# Altium PCB STM32F1_CNC_HW.PcbDoc
Units mil, origin at the board's own origin, x right, y up, seen from the top; angles counter-clockwise.
Board outline 5757.98 x 2962.75 mil, 2 copper layers (Top Layer, Bottom Layer); 64 components, 65 nets, 232 pads, 60 vias.
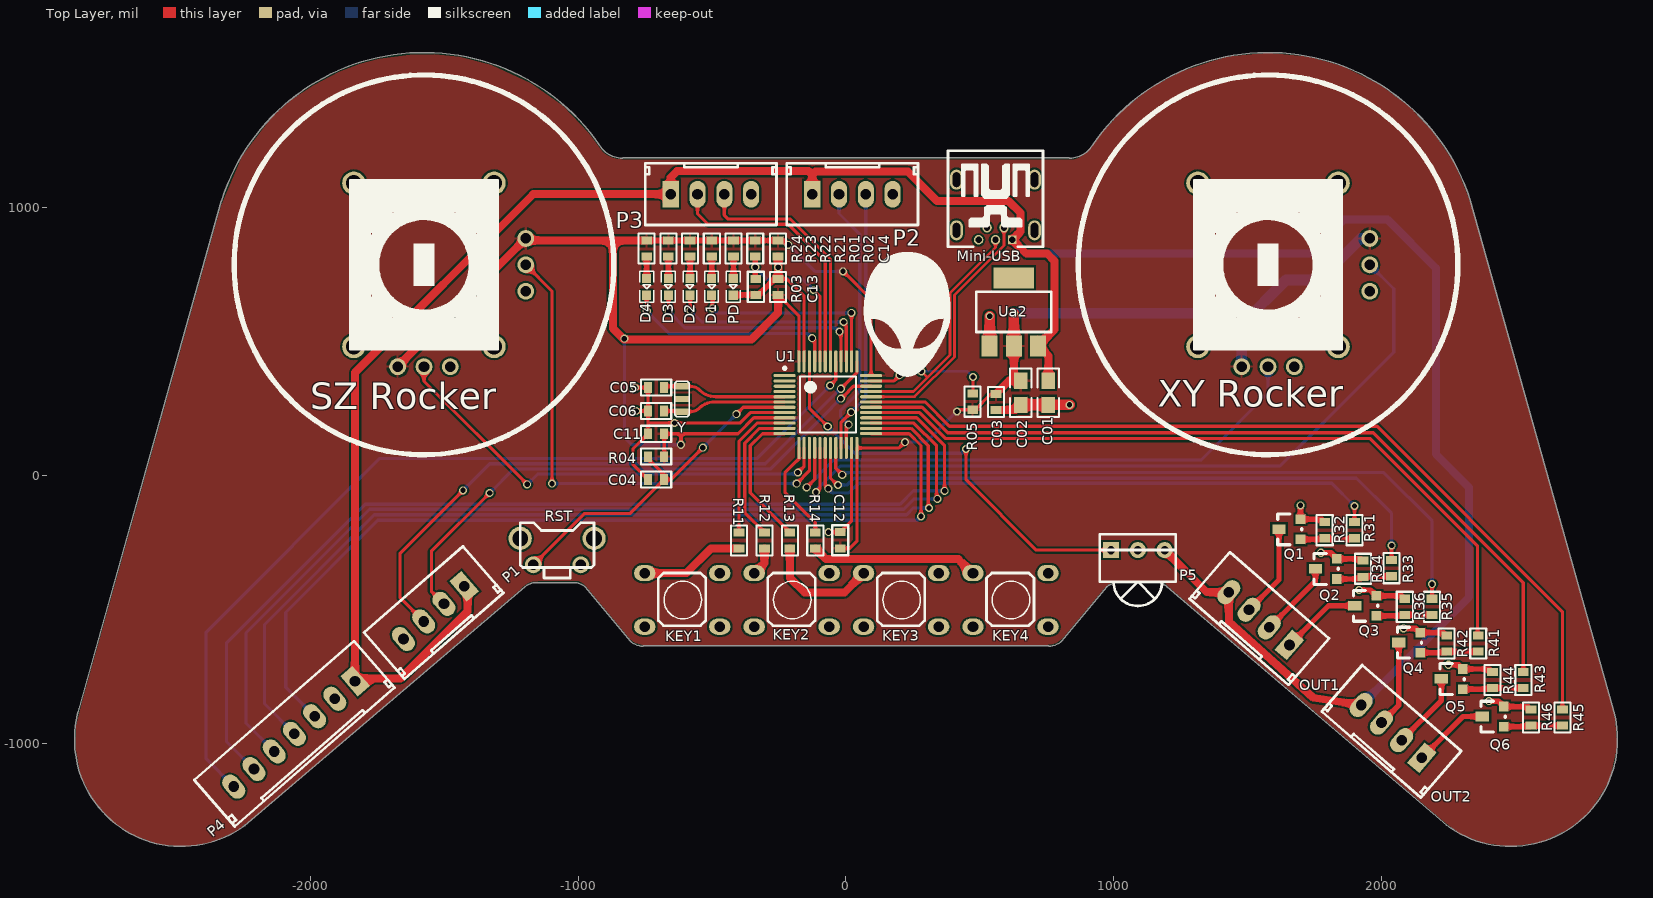
[diagram p0: Top Layer view]
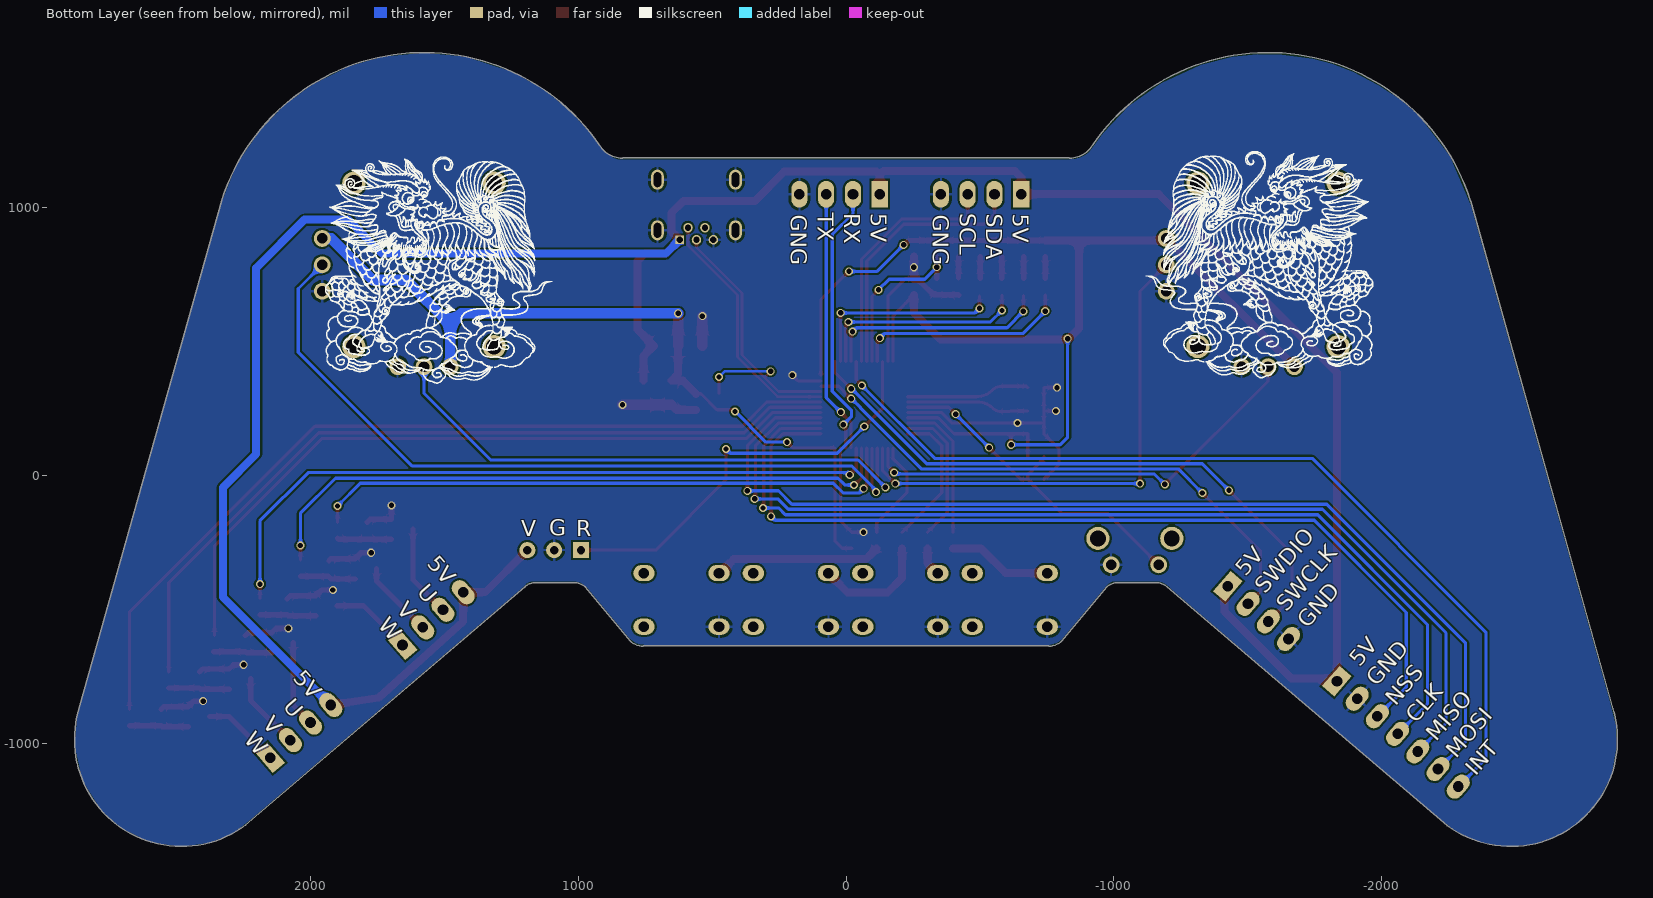
[diagram p1: Bottom Layer view, seen from below]

## Layer stack, top to bottom
Top Solder: solder mask 0.4, Solder Resist, Dk 3.5
Top Layer: signal copper 1.4
Dielectric 1: dielectric 12.6, FR-4, Dk 4.8
Bottom Layer: signal copper 1.4
Bottom Solder: solder mask 0.4, Solder Resist, Dk 3.5

## Board outline
-2862.24,-869.77 -2862.23,-869.73 cw(c-2480.32,-984.25) -2862.22,-869.68 -2862.23,-869.73 -2330.5,1025.82 -2330.47,1025.91 -2329.98,1027.68 cw(c-2325.15,1026.32) -2329.63,1028.58 cw(c-1574.8,787.4) -920.29,1234.1 cw(c-922.64,1229.67) -918.34,1232.25 ccw(c-836.57,1281.31) -834.16,1185.98 cw(c-833,1181.1) -833,1186.12 833,1186.12 cw(c833,1181.1) 834.16,1185.98 ccw(c836.57,1281.31) 918.34,1232.25 cw(c922.64,1229.67) 920.29,1234.1 cw(c1574.8,787.4) 2329.62,1028.6 cw(c2325.15,1026.32) 2329.98,1027.68 2858.61,-858.28 cw(c2480.32,-984.25) 2879.03,-984.25 cw(c2480.32,-984.25) 2241.09,-1303.22 cw(c2244.09,-1299.21) 2240.84,-1303.03 1198.61,-415.2 cw(c1201.86,-411.38) 1197.06,-412.85 ccw(c1159.5,-455.84) 1160.08,-398.76 ccw(c1159.5,-455.84) 1160.05,-398.75 1160.08,-398.76 1012.48,-398.72 cw(c1011.9,-393.74) 1011.95,-398.75 ccw(c1012.5,-455.84) 973.35,-414.29 805.17,-616.36 cw(c801.31,-613.15) 804.77,-616.78 cw(c758.5,-568.16) 759.15,-635.27 cw(c759.1,-630.26) 757.29,-634.94 -757.29,-634.94 cw(c-759.1,-630.26) -759.15,-635.27 cw(c-758.5,-568.16) -804.77,-616.78 cw(c-801.31,-613.15) -805.17,-616.36 -973.35,-414.29 ccw(c-1012.5,-455.84) -1011.95,-398.75 cw(c-1011.9,-393.74) -1012.53,-398.72 -1158.47,-398.72 cw(c-1159.1,-393.74) -1159.05,-398.75 ccw(c-1158.5,-455.84) -1197.85,-414.48 cw(c-1201.31,-410.85) -1198.12,-414.72 cw(c-1201.86,-411.38) -1198.61,-415.2 -2243.51,-1305.02 -2243.52,-1305.02 -2243.53,-1305.03 ccw(c-2246.77,-1301.2) -2243.51,-1305.02 -2243.53,-1305.03 cw(c-2246.77,-1301.2) -2243.8,-1305.24 cw(c-2480.32,-984.25)

## Design rules (kind name [scope] priority, off if disabled: settings)
Clearance [All] p1: gap=7
PolygonConnect PolygonConnect_1 [isvia] p1: connectstyle=Direct reliefconductorwidth=10 reliefentries=4 polygonreliefangle="90 Angle" airgapwidth=10
PolygonConnect [All] p2: connectstyle=Relief reliefconductorwidth=10 reliefentries=4 polygonreliefangle="90 Angle" airgapwidth=10
RoutingVias [All] p1: holewidth=28 width=50 viastyle="Through Hole" minholewidth=28 minwidth=50 maxholewidth=28 maxwidth=50
SolderMaskExpansion [All] p1: expansion=4
Width [All] p1: maxlimit=100 minlimit=10 preferedwidth=30
30 further rules are at their usual default settings.

## Components (designator, comment, footprint, x,y, rotation, side; value= is the part's Value field where it differs from the comment)
C01 "100nF" 0805 755,265 r90 top
C02 "10uF 0805" 0805 652,355 r270 top
C03 "100nF" 0603 560,245.42 r90 top
C04 "100nF" 0603 -677.69,-13 r180 top
C05 "20pF" 0603 -739.01,329 r0 top
C06 "20pF" 0603 -739.01,241.69 r0 top
C11 "100nF" 0603 -677.69,157.31 r180 top
C12 "100nF" 0603 -21,-271 r90 top
C13 "100nF" 0603 -253,674.36 r90 top
C14 "100nF" 0603 -254,879 r270 top
D1 "LED0" LED-0603 -501.5,737 r270 top
D2 "LED0" LED-0603 -582.25,737 r270 top
D3 "LED0" LED-0603 -663,737 r270 top
D4 "LED0" LED-0603 -743.75,737 r270 top
KEY1 "微动开关" KeyB-6*6 -751,-363 r0 top
KEY2 "微动开关" KeyB-6*6 -342.67,-363 r0 top
KEY3 "微动开关" KeyB-6*6 65.67,-363 r0 top
KEY4 "微动开关" KeyB-6*6 474,-363 r0 top
Mini-USB "Mini-USB" USB-mini-S 558,993 r0 top
OUT1 "Header 4" HDR-2.54-4P 1655,-631 r139 top
OUT2 "Header 4" HDR-2.54-4P 2149,-1052 r139 top
P1 "SWDIO" HDR-2.54-4P -1425,-412 r221 top
P2 "UART" HDR-2.54-4P -126,1051 r0 top
P3 "I2C" HDR-2.54-4P -654,1051 r0 top
P4 "SPI" HDR-2.54-7P -1832,-766 r221 top
P5 "IR" IR-HS1838 1089,-277 r0 top
PD "LED" LED-0603 -420.75,737 r270 top
Q1 "MOSFET-N" SOT-23 1696,-237 r90 top
Q2 "MOSFET-N" SOT-23 1832,-385 r90 top
Q3 "MOSFET-N" SOT-23 1979,-522.74 r90 top
Q4 "MOSFET-N" SOT-23 2143,-660 r90 top
Q5 "MOSFET-N" SOT-23 2302,-795.74 r90 top
Q6 "MOSFET-N" SOT-23 2455,-936 r90 top
R01 "510R" 0603 -419.29,817.69 r90 top
R02 "10K" 0603 -339,879 r270 top
R03 "0" 0603 -337,736 r270 top
R04 "10K" 0603 -677.69,72.16 r180 top
R05 "1.5K" 0603 473,246 r90 top
R11 "4.7K" 0603 -399.53,-210.26 r270 top
R12 "4.7K" 0603 -304.65,-210.26 r270 top
R13 "4.7K" 0603 -209.77,-210.26 r270 top
R14 "4.7K" 0603 -114.88,-210.26 r270 top
R21 "330R" 0603 -501.13,879 r270 top
R22 "330R" 0603 -582.2,879 r270 top
R23 "330R" 0603 -663.27,879 r270 top
R24 "330R" 0603 -744.34,879 r270 top
R31 "2K" 0603 1897,-172.26 r270 top
R32 "22K" 0603 1786,-172.26 r270 top
R33 "2K" 0603 2035,-314 r270 top
R34 "22K" 0603 1929,-316 r270 top
R35 "2K" 0603 2186,-458 r270 top
R36 "22K" 0603 2085,-458 r270 top
R41 "2K" 0603 2359,-595.26 r270 top
R42 "22K" 0603 2241,-595.26 r270 top
R43 "2K" 0603 2527,-731 r270 top
R44 "22K" 0603 2412,-731 r270 top
R45 "2K" 0603 2673,-871.26 r270 top
R46 "22K" 0603 2556,-871.26 r270 top
RST "SW-PB" RST-6*6 -1078,-332 r0 top
"SZ Rocker" "XY Rocker" "XY Rocker" -1574.8,787.4 r0 top
U1 "STM32F103C8" QFP48 -229,374 r0 top
Ua2 "LM1117-3.3" SOT223 536,485 r0 top
"XY Rocker" "XY Rocker" "XY Rocker" 1574.8,787.4 r0 top
Y "8MHZ" XTAL-3215-3P -612,287 r90 top

## Footprints (in the part's own frame and the unit in brackets; to place one, negate y for a bottom-side part, rotate by r counter-clockwise, add the part's x,y. Pads: shape width x height; smd on the part's side, far side on the other; paste and mask are expansions set on the pad)
0603 [mil]
  rect 30x40 smd: 1(0.66,0.41) 2(60.66,0.41)
  silkscreen extent -25,-30 87,30
0805 [mil]
  rect 60x50 smd: 1(0,0) 2(90,0)
  silkscreen extent -45,-40 135,40
HDR-2.54-4P [mil] "HDR-2.54mm-4P"
  rect 60x100 hole 40: 1(0,0)
  oval 60x100 hole 40: 2(100,0) 3(200,0) 4(300,0)
  silkscreen extent -95,-115 395,115
HDR-2.54-7P [mil] "HDR-2.54mm-7P"
  rect 60x100 hole 40: 1(0,0)
  oval 60x100 hole 40: 2(100,0) 3(200,0) 4(300,0) 5(400,0) 6(500,0) 7(600,0)
  silkscreen extent -95,-115 695,115
IR-HS1838 [mil] "IR-HS1838"
  rect 60x60 hole 31.5: 1(-100,0)
  round 60 hole 31.5: 2(0,0) 3(100,0)
  silkscreen extent -142,-209 142,59
KeyB-6*6 [mil] "KeyB-6*6*5mm"
  oval 80x60 hole 39.37: 1(0,0) 2(0,-200) 3(280,0) 4(280,-200)
  silkscreen extent 51,-196 228,1
LED-0603 [mil]
  rect 34x34 smd: 1(0,0) 2(63,0)
  silkscreen extent -26,-26 89,26
QFP48 [mm]
  oval 2.1x0.3 smd: 1(0,0) 2(0,-0.5) 3(0,-1) 4(0,-1.5) 5(0,-2) 6(0,-2.5) 7(0,-3) 8(0,-3.5) 9(0,-4) 10(0,-4.5) 11(0,-5) 12(0,-5.5) 25(8.2,-5.5) 26(8.2,-5) 27(8.2,-4.5) 28(8.2,-4) 29(8.2,-3.5) 30(8.2,-3) 31(8.2,-2.5) 32(8.2,-2) 33(8.2,-1.5) 34(8.2,-1) 35(8.2,-0.5) 36(8.2,0)
  oval 0.3x2.1 smd: 13(1.35,-6.85) 14(1.85,-6.85) 15(2.35,-6.85) 16(2.85,-6.85) 17(3.35,-6.85) 18(3.85,-6.85) 19(4.35,-6.85) 20(4.85,-6.85) 21(5.35,-6.85) 22(5.85,-6.85) 23(6.35,-6.85) 24(6.85,-6.85) 37(6.85,1.35) 38(6.35,1.35) 39(5.85,1.35) 40(5.35,1.35) 41(4.85,1.35) 42(4.35,1.35) 43(3.85,1.35) 44(3.35,1.35) 45(2.85,1.35) 46(2.35,1.35) 47(1.85,1.35) 48(1.35,1.35)
  silkscreen extent -0.12,-5.4 6.75,0.82, body extent 0.6,-6.25 7.6,0.75, height 1.6
RST-6*6 [mm] "侧按按键-6*6mm"
  round 2.2 hole 1.5: 0(-3.5,2.5) 0(3.5,2.5)
  round 1.6 hole 1: 1(-2.25,0) 2(2.25,0)
  Top Layer lines w0.254: 3.5,2.5 3.5,2.5
  silkscreen extent -3.5,-1.25 3.5,4
SOT223 [mil]
  rect 59x79 smd: 1(0,0) 2(90.55,0) 3(181.1,0)
  rect 150x79 smd: 4(89.88,253.54)
  silkscreen extent -49,52 231,202
SOT-23 [mil]
  rect 36x36 smd: 1(0,0) 2(75,0)
  rect 36x50 smd: 3(38,80)
  silkscreen extent -20,-5 95,85
USB-mini-S [mm]
  oval 1.2x1.9 hole 0.7 slot 1.4 at 90 deg: 0(-3.7,-1.95) 0(-3.7,2.85) 0(3.7,-1.95) 0(3.7,2.85)
  rect 0.8x0.8 hole 0.6: 1(1.6,-2.85)
  round 0.9 hole 0.6: 2(0.8,-1.7) 3(0,-2.85) 4(-0.8,-1.7) 5(-1.6,-2.85)
  silkscreen extent -4.5,-3.5 4.5,5.6
XTAL-3215-3P [mm]
  rect 0.6x1.5 smd paste-0.051 mask+0.051: 1(-1.2,0) 2(0,0) 3(1.2,0)
  silkscreen extent -1.7,-0.7 1.7,0.7
"XY Rocker" [mm]
  round 2.2 hole 1.5: 0(-6.65,-7.75) 1(6.65,-7.75) 2(6.65,7.75) 3(-6.65,7.75)
  round 1.6 hole 1: X1(-2.5,-9.65) X2(0,-9.65) X3(2.5,-9.65) Y1(9.65,2.5) Y2(9.65,0) Y3(9.65,-2.5)
  silkscreen extent -18,-18 18,18

## Part data
C01: library part "CAP SMD 0603  X5R 1礔 25V 10%", "0603  X5R"
C02: library part "CAP SMD 0603  X5R 1礔 25V 10%", "0603  X5R 1礔"
C03: library part Capacitor_ST, "Capacitor 0402 / 0603 / 0805"
C04 C05 C06 C11 C12 C13 C14: library part CAP, "Capacitor"
D1 D2 D3 D4: "Typical INFRARED GaAs LED"
Mini-USB: library part Mini-USB_G
OUT1 OUT2: "Header, 4-Pin"
P1 P2 P3: library part "Header 4", "Header, 4-Pin"
P4: library part "Header 7", "Header, 7-Pin"
P5: library part "Header 3", "Header, 3-Pin"
PD: library part LED2, "Typical RED, GREEN, YELLOW, AMBER GaAs LED"
Q1 Q2 Q3 Q4 Q5 Q6: "N-Channel MOSFET"
R01 R02 R03 R04 R05 R11 R12 R13 R14 R21 R22 R23 R24 R31 R32 R33 R34 R35 R36 R41 R42 R43 R44 R45 R46: library part RES1, "Resister"
RST: "Switch"
Ua2: library part "Volt Reg", "Voltage Regulator"
Y: library part ECS-10-13-1, "Crystal Oscillator"

## Via types
v1: diameter 30, hole 20, Top Layer to Bottom Layer, tented both sides, 60 vias

## Nets (pads, with @x,y where several pads share a name; then routed paths per layer and width w, separated by ;. In a path a pad name is that pad's centre, name@x,y a point inside that pad or via, vN(x,y) a via of type N, cw(c..) or ccw(c..) an arc to the next point about the centre after c; other vN are vias at no path point)
AD1: "SZ Rocker.X2" U1.14 | length 1729.3
  Top Layer w12: -1574.8,407.48 -1574.8,352.8 v1(-1190,-32) ; v1(-179.5,12.5) -156.17,35.83 U1.14
  Bottom Layer w12: v1(-1190,-32) -1151,7 -185,7 v1(-179.5,12.5)
AD2: "SZ Rocker.Y2" U1.15 | length 1922.9
  Top Layer w12: -1194.88,787.4 -1097,689.52 v1(-1097,-29) ; v1(-184,-29) -136.48,18.52 U1.15
  Bottom Layer w12: v1(-1097,-29) v1(-184,-29)
AD3: "XY Rocker.X2" U1.16 | length 2126.6
  Top Layer w12: v1(-147,-43) -116.8,-12.8 U1.16
  Bottom Layer w12: v1(-147,-43) -45,59 1326,59 1574.8,307.8 1574.8,407.48
AD4: "XY Rocker.Y2" U1.17 | length 2912.9
  Top Layer w12: v1@-113,-62 v1(-112,-61) -97.11,-46.11 U1.17
  Bottom Layer w12: v1(-112,-61) -112,-54.4 -20.6,37 1620,37 2044,461 2044,699 2043.13,699 1954.72,787.4
BOOT: R02.2 R03.1 U1.44 | length 610.5
  Top Layer w12: v1(-121,694) -97.11,670.11 U1.44
  Top Layer w20: R03.1@-338.59,737.34 v1(-338.59,779) R02.2
  Bottom Layer w12: v1(-338.59,779) -293.59,734 -161,734 v1(-121,694)
GND: "SZ Rocker.X3" "SZ Rocker.Y3" "XY Rocker.X3" "XY Rocker.Y3" C01.1 C02.2 C03.1 C04.2 C05.1 C06.1 C11.2 C12.2 C13.2 C14.2 KEY1.2 KEY2.2 KEY3.2 KEY4.2 Mini-USB.0 Mini-USB.5 P1.4 P2.4 P3.4 P4.2 P5.2 PD.2 Q1.2 Q2.2 Q3.2 Q4.2 Q5.2 Q6.2 R03.2 R32.1 R34.1 R36.1 R42.1 R44.1 R46.1 RST.2 U1.8 U1.23 U1.35 U1.47 Ua2.1 | length 3566.1
  Top Layer w12: v1(-787.59,329.41) C05.1 C06.1 ; v1(-782.9,242.1) C06.1 ; C04.2 -795,43.24 -795,100.25 C11.2 C06.1 ; -737.35,197 -396,197 -356.8,236.2 U1.8 ; C13.2 -221.01,735.01 -156.17,670.17 U1.47 ; v1(-65.34,-210.34) C12.2 21,-167.93 U1.23 ; U1.35 179.32,354.32 v1(200.5,375.5)
  Top Layer w20: PD.2 -419.41,675.34 R03.2 -326.66,675.34 -266.99,735.01 C13.2 ; v1(1696,-110) Q1.2 1775.49,-162 R32.1 ; v1(1772,-287) 1809,-287 Q2.2 1922.75,-310 R34.1 ; v1(1915,-426) 1957.26,-426 Q3.2 2074.49,-447.74 R36.1 ; v1(2081,-569) 2127,-569 Q4.2 2230.49,-585 R42.1 ; v1(2248,-705) 2286.26,-705 Q5.2 2401.49,-720.74 R44.1 ; v1@2394,-841 2435,-841 Q6.2 2545.49,-861 R46.1
  Top Layer w30: KEY1.2@-758.42,-563 KEY1.2 ; C13.2 v1(-253.41,778.41) C14.2@-253.41,818.16 ; C03.1 633.08,246.08 C02.2
  Top Layer w40: Ua2.1 v1(536,596) ; C02.2 C01.1 v1(834,265)
  other v1: 2399,-841 -640,197
I2C_SCL: P3.3 U1.42 | length 923.8
  Top Layer w12: P3.3 -454,973 -439,958 -207.13,958 -57.74,808.61 U1.42
I2C_SDA: P3.2 U1.43 | length 997
  Top Layer w12: P3.2 -554,978 -515,939 -215,939 -77.43,801.43 U1.43
IR: P5.1 U1.46 | length 1600
  Top Layer w12: U1.46 -136.48,252.48 v1(-68,184) ; v1(448,100) 448,-14.93 710.07,-277 P5.1
  Bottom Layer w12: v1(-68,184) 32,84 432,84 v1(448,100)
KEY1: R11.1 U1.10 | length 538.7
  Top Layer w12: R11.1 -399.12,129.88 -332.17,196.83 U1.10
KEY2: R12.1 U1.11 | length 535.3
  Top Layer w12: R12.1 -378,-137.16 -378,122 -322.85,177.15 U1.11
KEY3: R13.1 U1.12 | length 530.9
  Top Layer w12: U1.12 -311.54,157.46 -357,112 -357,-63.28 R13.1
KEY4: R14.1 U1.13 | length 383.9
  Top Layer w12: U1.13 -175.85,63.15 -228,11 -228,-61 -114.47,-174.53 R14.1
LED1: D1.2 U1.38 | length 751.4
  Top Layer w12: v1(-498,625) D1.2@-498,670.5 ; U1.38 v1@21,608
  Bottom Layer w12: v1(-498,625) -481,608 v1(20,608)
LED2: D2.2 U1.39 | length 801.8
  Top Layer w12: v1(-582,617) D2.2@-582,673.75 ; v1@-14,575 1.32,559.69 U1.39
  Bottom Layer w12: v1(-582,617) -539,574 v1(-9,574)
LED3: D3.2 U1.40 | length 840.2
  Top Layer w12: v1(-662,614) D3.2@-662,673 ; v1@-23,537 -18.37,532.37 U1.40
  Bottom Layer w12: v1(-662,614) -601,553 -39,553 v1(-24,538)
LED4: D4.2 U1.45 | length 809
  Top Layer w12: v1@-743.75,614.75 D4.2 ; v1(-126,514) -116.8,504.8 U1.45
  Bottom Layer w12: v1(-743.5,614.5) -660,531 -143,531 v1(-126,514)
NetD1_1: D1.1 R21.2 | length 80.6
  Top Layer w20: D1.1@-500.72,737.78 R21.2
NetD2_1: D2.1 R22.2 | length 80.9
  Top Layer w20: D2.1@-581.79,737.46 R22.2
NetD3_1: D3.1 R23.2 | length 81.2
  Top Layer w20: D3.1@-662.86,737.14 R23.2
NetD4_1: D4.1 R24.2 | length 81.2
  Top Layer w20: D4.1@-743.93,737.18 R24.2
NetKEY1_1: KEY1.1 R11.2 | length 390
  Top Layer w30: KEY1.1 -596,-363 -503.92,-270.92 R11.2
NetKEY2_1: KEY2.1 R12.2 | length 110.4
  Top Layer w30: KEY2.1@-343.67,-365 -304.24,-325.57 R12.2
NetKEY3_1: KEY3.1 R13.2 | length 436.1
  Top Layer w30: R13.2 -209.36,-380.64 -154,-436 -6.33,-436 KEY3.1@64.67,-365
NetKEY4_1: KEY4.1 R14.2 | length 626.4
  Top Layer w30: R14.2 -74.4,-311 419,-311 KEY4.1@473,-365
NetPD_1: PD.1 R01.1 | length 80.3
  Top Layer w20: PD.1@-419.7,738.06 R01.1
NetQ1_1: Q1.1 R31.2 R32.2 | length 203.1
  Top Layer w20: Q1.1 1893.33,-237 R31.2
NetQ2_1: Q2.1 R33.2 R34.2 | length 207.7
  Top Layer w20: Q2.1 1921.07,-385 R34.2 1931.41,-374.66 R33.2
NetQ3_1: Q3.1 R35.2 R36.2 | length 209.1
  Top Layer w20: Q3.1 2081.33,-522.74 R36.2 R35.2
NetQ4_1: Q4.1 R41.2 R42.2 | length 218.1
  Top Layer w20: Q4.1 2237.33,-660 R42.2 R41.2
NetQ5_1: Q5.1 R43.2 R44.2 | length 227.1
  Top Layer w20: Q5.1 2408.33,-795.74 R44.2 R43.2
NetQ6_1: Q6.1 R45.2 R46.2 | length 220.1
  Top Layer w20: Q6.1 2552.33,-936 R46.2 R45.2
NRST: C04.1 R04.2 RST.1 U1.7 | length 1291.1
  Top Layer w12: RST.1 -974.58,-140 -804.94,-140 C04.1 ; R04.2 -738.35,63.35 -678.35,3.35 C04.1 ; v1(-534,105) -652.41,-13.41 C04.1 ; v1(-409,230) -383.11,255.89 U1.7
  Bottom Layer w12: v1(-534,105) v1(-409,230)
OSC32I: U1.3
OSC32O: U1.4
OUT1_U: OUT1.3 Q1.3 | length 347.2
  Top Layer w20: OUT1.3 1616,-387.85 Q1.3
OUT1_V: OUT1.2 Q2.3 | length 289.8
  Top Layer w20: OUT1.2 1752,-392.92 Q2.3
OUT1_W: OUT1.1 Q3.3 | length 304.6
  Top Layer w20: OUT1.1 1801.26,-484.74 Q3.3
OUT2_U: OUT2.3 Q4.3 | length 325.7
  Top Layer w20: OUT2.3 2063,-855.85 Q4.3
OUT2_V: OUT2.2 Q5.3 | length 290.2
  Top Layer w20: OUT2.2 2222,-837.92 Q5.3
OUT2_W: OUT2.1 Q6.3 | length 289.8
  Top Layer w20: OUT2.1 2303,-898 Q6.3
PWM1_U: R31.1 U1.18 | length 2237.4
  Top Layer w12: U1.18 -77.43,-36.57 v1(-66,-48) ; R31.1@1897.5,-172.83 v1(1897.5,-112.5)
  Bottom Layer w12: v1(-66,-48) -50,-64 11,-64 47,-28 1813,-28 v1(1897.5,-112.5)
PWM1_V: R33.1 U1.19 | length 2451.8
  Top Layer w12: U1.19 -57.74,-9.26 v1@-34,-33 ; R33.1@2036,-314.07 v1(2036,-260)
  Bottom Layer w12: v1(-30,-34) 5,-34 30,-9 1905,-9 2036,-140 v1(2036,-260)
PWM1_W: R35.1 U1.20 | length 2679.2
  Top Layer w12: U1.20 -38.06,28.06 v1(-14,4) ; R35.1@2187,-458.07 v1(2187,-404)
  Bottom Layer w12: v1(-14,4) -6,12 2007,12 2187,-168 v1(2187,-404)
PWM2_U: R41.1 U1.29 | length 2803.4
  Top Layer w12: U1.29 274.8,236.2 372,139 1956,139 2357,-262 R41.1@2357,-595.92
PWM2_V: R43.1 U1.30 | length 3037.8
  Top Layer w12: U1.30 284.11,255.89 379,161 1968,161 2527.41,-398.41 R43.1
PWM2_W: R45.1 U1.31 | length 3269
  Top Layer w12: U1.31 295.43,275.57 386,185 1982,185 2673.41,-506.41 R45.1
SPI_CLK: P4.4 U1.26 | length 3588.2
  Top Layer w12: U1.26 242.85,177.15 307,113 307,-117 v1(310,-120)
  Bottom Layer w12: P4.4 -2170,-851.23 -2170,-555 -1760,-145 226,-145 251,-120 v1(310,-120)
SPI_INT: P4.7 U1.41 | length 3428.3
  Top Layer w12: v1(-59,337) -38.06,357.94 U1.41
  Bottom Layer w12: P4.7 -2388,-1056.46 -2388,-583 -1740,65 -331,65 v1(-59,337)
SPI_MISO: P4.5 U1.27 | length 3751.6
  Top Layer w12: U1.27 253.17,196.83 338,112 338,-83 v1(341,-86)
  Bottom Layer w12: P4.5 -2239,-923.31 -2239,-586 -1778,-125 215,-125 254,-86 v1(341,-86)
SPI_MOSI: P4.6 U1.28 | length 3913.3
  Top Layer w12: U1.28 263.48,216.52 368,112 v1(368,-56)
  Bottom Layer w12: P4.6 -2312,-991.38 -2312,-624 -1794,-106 202,-106 252,-56 v1(368,-56)
SPI_NSS: P4.3 U1.25 | length 3420.3
  Top Layer w12: U1.25 235.67,157.46 280,113.13 v1(280,-151)
  Bottom Layer w12: P4.3 -2091,-789.15 -2091,-510 -1747,-166 265,-166 v1(280,-151)
SWCLK: P1.3 U1.37 | length 2316.9
  Top Layer w12: P1.3 -1664,-455.15 -1664,-289 v1(-1429,-54) ; v1(-19,325) 40.68,384.67 U1.37
  Bottom Layer w12: v1(-1429,-54) -1330,45 -301.6,45 -21.6,325 v1(-19,325)
SWDIO: P1.2 U1.34 | length 2114.2
  Top Layer w12: P1.2 -1547,-431.08 -1547,-281 v1(-1330,-64) ; v1(-19,288) -16.38,288 9,313.38 9,316 27.63,334.63 U1.34
  Bottom Layer w12: v1(-1330,-64) -1240,26 -281,26 -55,252 -55,253.6 -20.6,288 v1(-19,288)
TEMP: U1.2
UART_RX: P2.2 U1.22 | length 1024.8
  Top Layer w12: U1.22 1.32,182.32 v1(10,191)
  Bottom Layer w12: P2.2 -26,979 51,902 51,315 -21,243 -21,222 v1(10,191)
UART_TX: P2.3 U1.21 | length 984.9
  Top Layer w12: U1.21 -18.37,199.63 v1(19.5,237.5)
  Bottom Layer w12: v1(19.5,237.5) 74,292 P2.3
USB-DM: Mini-USB.2 U1.32 | length 931.3
  Top Layer w10: U1.32 256.3,295.26 405,443.96 405,674.96 589.5,859.45 Mini-USB.2
USB-DP: Mini-USB.3 R05.2 U1.33 | length 1145.9
  Top Layer w10: U1.33 251.94,314.94 304,367 ; v1(281,390) 304,367 ; R05.2@474,308.07 v1(474,369) ; Mini-USB.3 558,852 388,682 388,451 304,367
  Bottom Layer w10: v1(281,390) 453,390 v1(474,369)
USB-ID: Mini-USB.4
VBAT: U1.1
VDD_3.3V: "SZ Rocker.X1" "SZ Rocker.Y1" "XY Rocker.X1" "XY Rocker.Y1" C02.1 C03.2 C11.1 C12.1 C13.1 C14.1 R01.2 R02.1 R04.1 R05.1 R21.1 R22.1 R23.1 R24.1 U1.9 U1.24 U1.36 U1.48 Ua2.2 | length 7921.1
  Top Layer w12: R04.1 C11.1 -616,156.9 ; v1(-616,116) -616,156.9 ; C13.1 -175.85,597.45 U1.48 ; U1.9 -343.48,216.52 -403.1,156.9 -616,156.9 ; C12.1 14.66,-270.34 40.68,-244.31 U1.24 198.32,104.32 v1(220,126) ; v1(-11,763) 93.83,658.17 U1.36 ; v1(414,240) 420.66,246.66 R05.1 481.66,246.66 541.08,306.08 C03.2
  Top Layer w20: R24.1 R23.1 R22.1 R21.1 R01.2 R02.1 C14.1 -233.34,878.34 -217,862 v1(-215,862)
  Top Layer w30: -1673.23,407.48 -1194.88,885.83 -1187.4,878.34 -870,878.34 ; R24.1 -870,878.34 ; C13.1 -253.41,608.59 -353,509 -829,509 -870,550 -870,878.34 ; C03.2 608.51,355 C02.1 626.55,380.45 Ua2.2
  Top Layer w40: Ua2.2 v1(626.55,606.55)
  Bottom Layer w12: v1(-827,512) -827,144 -799,116 v1(-616,116) ; v1(-215,862) -116,763 v1(-11,763) ; v1(220,126) 299,126 v1@415.5,242.5
  Bottom Layer w40: v1(626.55,606.55) 1435.45,606.55 1476.38,565.62 ; 1476.38,407.48 1476.38,565.62 ; 1954.72,885.83 1920.83,885.83 1766,731 1641.76,731 1476.38,565.62
VDD_5V: C01.2 Mini-USB.1 OUT1.4 OUT2.4 P1.1 P2.1 P3.1 P4.1 P5.3 Ua2.3 | length 10130.8
  Top Layer w30: P1.1 -1412,-425 -1412,-506 -1662,-756 -1832,-756 -1832,386 -1167,1051 P3.1 -654,1113 -630,1137 -140,1137 -126,1123 ; P2.1 -126,1123 ; C01.2 755,447.1 Ua2.3 778,545.9 778,802 751,829 672.79,829 Mini-USB.1 652,911.8 652,981 607,1026 340,1026 231,1135 -114,1135 -126,1123 ; P5.3 1346.18,-434.18 OUT1.4 1428.59,-543.59 1744,-828 OUT2.4
  Bottom Layer w30: Mini-USB.1 672.79,829 1731,829 1858,956 2021,956 2201,776 2201,81 2325,-43 2325,-452.77 OUT2.4
XTAL1: C05.2 U1.5 Y.3 | length 461.8
  Top Layer w12: C05.2 -673.52,334.24 Y.3 -580.39,334.24 cw(c-580.39,285.61) -546,320 ccw(c-486.27,379.73) -486.27,295.26 U1.5
XTAL2: C06.2 U1.6 Y.1 | length 456.6
  Top Layer w12: C06.2 Y.1@-614.34,242.1 ; Y.1 -577.15,239.76 ccw(c-577.15,278.15) -550,251 cw(c-490.67,191.67) -490.67,275.57 U1.6
pads on no net: "SZ Rocker.0" "SZ Rocker.1" "SZ Rocker.2" "SZ Rocker.3" "XY Rocker.0" "XY Rocker.1" "XY Rocker.2" "XY Rocker.3" KEY1.3 KEY1.4 KEY2.3 KEY2.4 KEY3.3 KEY3.4 KEY4.3 KEY4.4 RST.0 Ua2.4 Y.2

## Polygon pours and split planes (outlines as drawn)
GND on Bottom Layer "GND" (solid, pour order 5): -837.66,1180.17 -837.66,1181.17 -838.24,1181.17 cw(c-838.24,1281.17) -908.95,1210.46 -912.66,1214.17 -960.66,1278.17 -1057.66,1381.17 -1175.66,1465.17 -1325.66,1533.17 -1442.66,1563.17 -1535.66,1574.17 -1625.66,1572.17 -1741.66,1557.17 -1812.66,1538.17 -1891.66,1508.17 -1985.66,1458.17 -2065.66,1406.17 -2136.09,1347.19 -2252.66,1193.17 -2331.66,1008.17 -2852.66,-850.83 -2872.66,-934.83 -2874.66,-1012.83 -2856.39,-1119.41 -2803.66,-1218.83 -2734.22,-1293.67 -2651.45,-1345.52 -2558.86,-1376.61 -2461.41,-1383.32 -2365.1,-1367.09 -2276,-1327.07 -2177.66,-1249.83 -1217.66,-424.83 -1210.41,-417.58 cw(c-1150.66,-477.33) -1150.66,-392.83 -1011.08,-392.83 cw(c-1011.08,-396.25) -1008.66,-393.83 -1008.66,-392.83 cw(c-1008.66,-441.12) -974.52,-406.97 -971.66,-409.83 -803.66,-610.83 -803.66,-609.83 -803.66,-610.83 ccw(c-757.79,-564.96) -757.79,-629.83 -755.66,-629.83 756.34,-629.83 ccw(c756.34,-628.83) 757.34,-628.83 ccw(c757.34,-563.65) 803.43,-609.74 810.34,-602.83 963.34,-418.83 967.13,-415.04 cw(c1018.34,-466.26) 1018.34,-393.83 1159.34,-393.83 ccw(c1158.34,-393.83) 1158.34,-392.83 ccw(c1160.75,-390.42) 1160.75,-393.83 1170.34,-393.83 cw(c1170.34,-427.63) 1194.24,-403.73 1210.34,-419.83 2221.34,-1281.83 2291.47,-1337.14 2375.34,-1369.83 2479.65,-1384.28 2595.53,-1367.09 2701.44,-1317 2775.08,-1252.84 2848.46,-1137.85 2877.89,-1004.65 2866.42,-888.2 2330.34,1020.17 2272.99,1160.11 2186.69,1289.27 2096.9,1382.66 1992.59,1459.49 1853.27,1528.2 1728.82,1564.18 1574.14,1579.41 1419.47,1564.18 1247.1,1508.35 1133.66,1445.79 1032.45,1364.93 945.14,1269.22 915.58,1227.24 894.5,1206.16 cw(c829.34,1271.32) 829.34,1179.17 -836.66,1179.17
VDD_3.3V on Top Layer "VCC_3.3V" (solid, remove dead copper, pour order 5): -837.66,1180.17 -837.66,1181.17 -838.24,1181.17 cw(c-838.24,1281.17) -908.95,1210.46 -912.66,1214.17 -960.66,1278.17 -1057.66,1381.17 -1175.66,1465.17 -1325.66,1533.17 -1442.66,1563.17 -1535.66,1574.17 -1625.66,1572.17 -1741.66,1557.17 -1812.66,1538.17 -1891.66,1508.17 -1985.66,1458.17 -2065.66,1406.17 -2136.09,1347.19 -2252.66,1193.17 -2331.66,1008.17 -2852.66,-850.83 -2872.66,-934.83 -2874.66,-1012.83 -2856.39,-1119.41 -2803.66,-1218.83 -2734.22,-1293.67 -2651.45,-1345.52 -2558.86,-1376.61 -2461.41,-1383.32 -2365.1,-1367.09 -2276,-1327.07 -2177.66,-1249.83 -1217.66,-424.83 -1210.41,-417.58 cw(c-1150.66,-477.33) -1150.66,-392.83 -1011.08,-392.83 cw(c-1011.08,-396.25) -1008.66,-393.83 -1008.66,-392.83 cw(c-1008.66,-441.12) -974.52,-406.97 -971.66,-409.83 -803.66,-610.83 -803.66,-609.83 -803.66,-610.83 ccw(c-757.79,-564.96) -757.79,-629.83 -755.66,-629.83 756.34,-629.83 ccw(c756.34,-628.83) 757.34,-628.83 ccw(c757.34,-563.65) 803.43,-609.74 810.34,-602.83 963.34,-418.83 967.13,-415.04 cw(c1018.34,-466.26) 1018.34,-393.83 1159.34,-393.83 ccw(c1158.34,-393.83) 1158.34,-392.83 ccw(c1160.75,-390.42) 1160.75,-393.83 1170.34,-393.83 cw(c1170.34,-427.63) 1194.24,-403.73 1210.34,-419.83 2221.34,-1281.83 2291.47,-1337.14 2375.34,-1369.83 2479.65,-1384.28 2595.53,-1367.09 2701.44,-1317 2775.08,-1252.84 2848.46,-1137.85 2877.89,-1004.65 2866.42,-888.2 2330.34,1020.17 2272.99,1160.11 2186.69,1289.27 2096.9,1382.66 1992.59,1459.49 1853.27,1528.2 1728.82,1564.18 1574.14,1579.41 1419.47,1564.18 1247.1,1508.35 1133.66,1445.79 1032.45,1364.93 945.14,1269.22 915.58,1227.24 894.5,1206.16 cw(c829.34,1271.32) 829.34,1179.17 -836.66,1179.17

## Silkscreen, mask and mechanical layers (free items; w line width, h text height)
Top Overlay:
  drawing of 694 lines, arcs and shapes, not listed
Bottom Overlay:
  drawing of 43592 lines, arcs and shapes, not listed
  text "TX" at 106,981 h60 r90
  text "SCL" at -425,980 h60 r90
  text "5V" at -92,979 h60 r90
  text "RX" at 7,979 h60 r90
  text "5V" at -623,978 h60 r90
  text "SDA" at -524,978 h60 r90
  text "GNG" at 207,975 h60 r90
  text "GNG" at -324,974 h60 r90
  text "G" at 1107,-223 h60
  text "R" at 1006,-226 h60
  text "V" at 1212,-226 h60
  text "5V" at 1566,-330 h60 r49
  text "5V" at -1491,-379 h60 r311
  text "U" at 1603,-436 h60 r49
  text "SWDIO" at -1565,-444 h60 r311
  text "V" at 1680,-501 h60 r49
  text "SWCLK" at -1644,-511 h60 r311
  text "W" at 1749,-560 h60 r49
  text "GND" at -1724,-573 h60 r311
  text "5V" at -1917,-716 h60 r311
  text "5V" at 2066,-757 h60 r49
  text "GND" at -1980,-789 h60 r311
  text "NSS" at -2052,-862 h60 r311
  text "U" at 2103,-863 h60 r49
  text "CLK" at -2128,-927 h60 r311
  text "V" at 2180,-928 h60 r49
  text "W" at 2249,-987 h60 r49
  text "MISO" at -2203,-995 h60 r311
  text "MOSI" at -2277,-1058 h60 r311
  text "INT" at -2350,-1122 h60 r311
Mechanical 1:
  lines w10: -2325.66,1024.51 cw(c-1574.8,787.4) -923.12,1229.34 ; -2325.15,1026.32 -2857.41,-871.12 ccw(c-2480.32,-984.25) -2246.77,-1301.2 -1201.86,-411.38 ; -1201.31,-410.85 cw(c-1158.5,-455.84) -1159.1,-393.74 ; -1159.5,-393.7 -1011.9,-393.7 ; -1011.9,-393.74 cw(c-1012.5,-455.84) -969.69,-410.85 -801.31,-613.15 ccw(c-758.5,-568.16) -759.1,-630.26 ; -922.64,1229.67 ccw(c-836.57,1281.31) -833,1181 ; -833,1181.1 833,1181.1 ; -759.1,-629.92 759.1,-629.92 ; 759.1,-630.26 ccw(c758.5,-568.16) 801.31,-613.15 969.69,-410.85 cw(c1012.5,-455.84) 1011.9,-393.74 ; 833,1181 ccw(c836.57,1281.31) 922.64,1229.67 ; 923.12,1229.34 cw(c1574.8,787.4) 2325.65,1024.51 ; 1011.9,-393.71 1160.1,-393.74 cw(c1159.5,-455.84) 1202.31,-410.85 ; 1201.86,-411.38 2244.09,-1299.21 ccw(c2480.32,-984.25) 2853.81,-859.75 2325.15,1026.32